# EAGLE board BMS Enerdel Adapter rev7 (EAGLE 9.6.2)
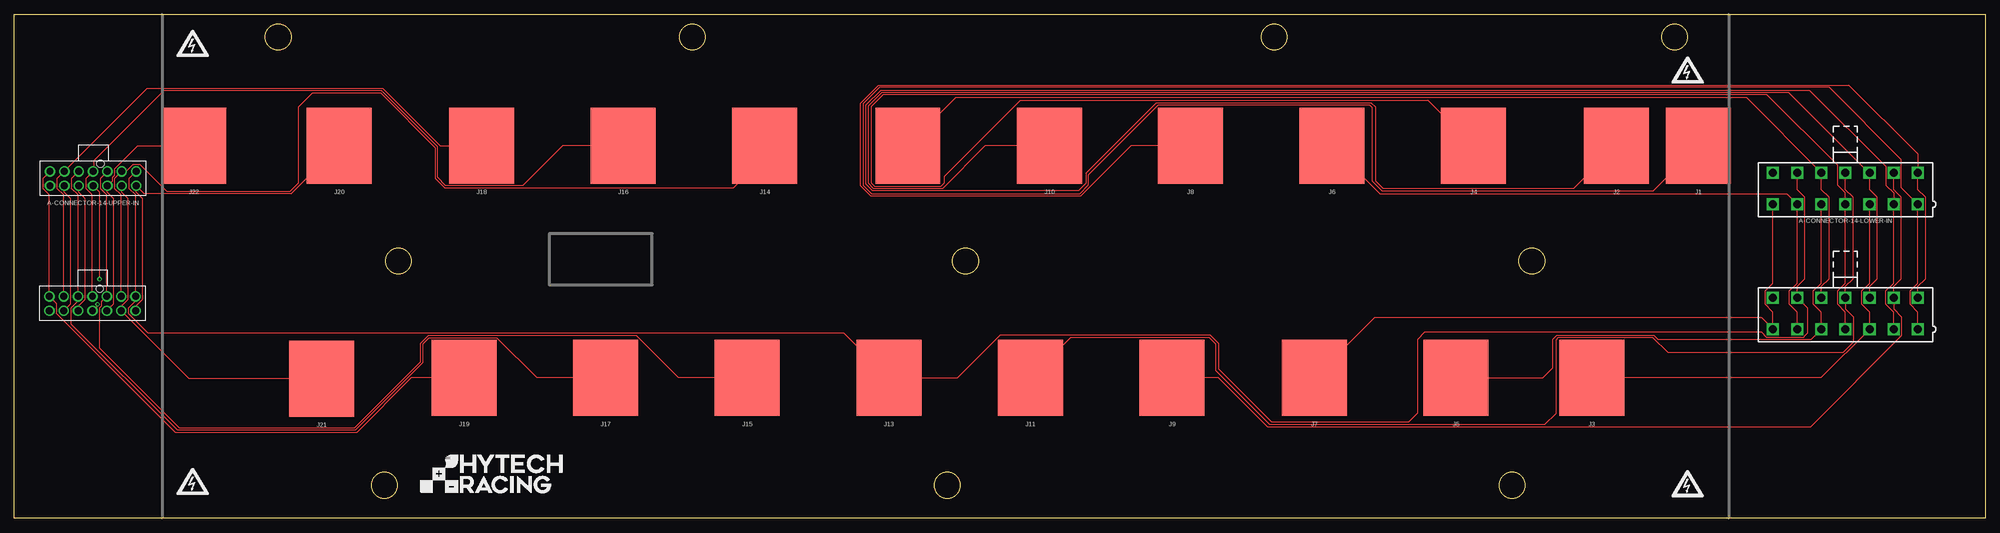
[diagram p0: board, top side]
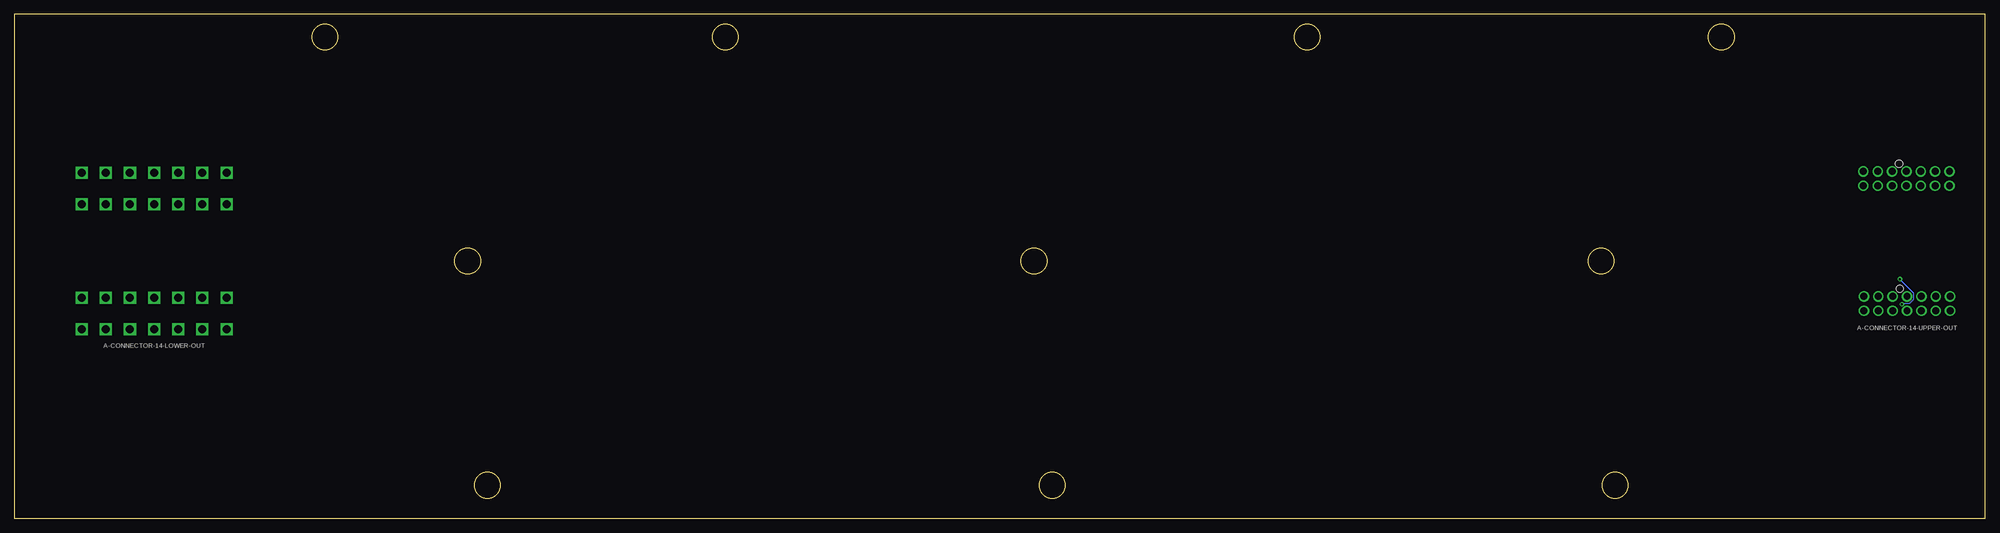
[diagram p1: board, bottom side, seen from below]

Size 342.9 x 87.63 mm. Coordinates in mm from the lower left corner, seen from the top.
Outline: 0,0 0,87.63 342.9,87.63 342.9,0 0,0
Outline: circle at 117.98,83.69 radius 2.25
Outline: circle at 219.2,83.69 radius 2.25
Outline: circle at 288.85,83.69 radius 2.25
Outline: circle at 66.8,44.7 radius 2.25
Outline: circle at 45.9,83.69 radius 2.25
Outline: circle at 165.48,44.7 radius 2.25
Outline: circle at 264.03,44.7 radius 2.25
Outline: circle at 260.6,5.71 radius 2.25
Outline: circle at 162.31,5.71 radius 2.25
Outline: circle at 64.39,5.71 radius 2.25
Copper layers (1*16): Top 0.035mm / dielectric 1.53mm / Bottom 0.035mm
Design rules "HyTech Default (2 Layer)": minimum track width 8mil, minimum drill 0.3mm, track to track 8mil, track to pad 8mil, pad to pad 8mil, via to via 22mil, smd to smd 8mil, copper to edge 17mil, drill to drill 23mil, minimum pad ring 9mil, minimum via ring 8mil, stop-mask expansion 8mil, vias tented up to drill 30mil, thermal gap 10mil

## Footprints (pad centres in the part's own frame; a part is rotated, then mirrored left to right if it is on the bottom)
MOLEX_MINIFIT_PTH_14 = drill 1.4 square: 1 12.6,-2.75; 2 8.4,-2.75; 3 4.2,-2.75; 4 0,-2.75; 5 -4.2,-2.75; 6 -8.4,-2.75; 7 -12.6,-2.75; 8 12.6,2.75; 9 8.4,2.75; 10 4.2,2.75; 11 0,2.75; 12 -4.2,2.75; 13 -8.4,2.75; 14 -12.6,2.75
MOLEX_NANOFIT_PTH_14 = drill 1.2: 1 7.5,0; 2 5,0; 3 2.5,0; 4 0,0; 5 -2.5,0; 6 -5,0; 7 -7.5,0; 8 7.5,-2.5; 9 5,-2.5; 10 2.5,-2.5; 11 0,-2.5; 12 -2.5,-2.5; 13 -5,-2.5; 14 -7.5,-2.5 | hole 1.3: 1.27,1.34
5222 = smd 11.303 x 13.208: 1 0,0

## Placement (x,y rotation side)
A-CONNECTOR-14-LOWER-IN  CONNECTOR-14_MINIFIT_  [MOLEX_MINIFIT_PTH_14]  318.59,57.35 0 top
A-CONNECTOR-14-LOWER-OUT  CONNECTOR-14_MINIFIT_  [MOLEX_MINIFIT_PTH_14]  318.59,35.61 0 top
A-CONNECTOR-14-UPPER-IN  CONNECTOR-14_NANOFIT_  [MOLEX_NANOFIT_PTH_14]  13.69,60.31 0 top
A-CONNECTOR-14-UPPER-OUT  CONNECTOR-14_NANOFIT_  [MOLEX_NANOFIT_PTH_14]  13.59,38.57 0 top
J1  CONNECTOR-1_5222_  [5222]  292.99,64.77 180 top
J2  CONNECTOR-1_5222_  [5222]  278.76,64.77 180 top
J3  CONNECTOR-1_5222_  [5222]  274.45,24.38 180 top
J4  CONNECTOR-1_5222_  [5222]  253.87,64.77 180 top
J5  CONNECTOR-1_5222_  [5222]  250.83,24.38 180 top
J6  CONNECTOR-1_5222_  [5222]  229.24,64.77 180 top
J7  CONNECTOR-1_5222_  [5222]  226.19,24.38 180 top
J8  CONNECTOR-1_5222_  [5222]  204.6,64.77 180 top
J9  CONNECTOR-1_5222_  [5222]  201.42,24.38 180 top
J10  CONNECTOR-1_5222_  [5222]  180.09,64.77 180 top
J11  CONNECTOR-1_5222_  [5222]  176.78,24.38 180 top
J12  CONNECTOR-1_5222_  [5222]  155.45,64.77 180 top
J13  CONNECTOR-1_5222_  [5222]  152.15,24.38 180 top
J14  CONNECTOR-1_5222_  [5222]  130.56,64.77 180 top
J15  CONNECTOR-1_5222_  [5222]  127.51,24.38 180 top
J16  CONNECTOR-1_5222_  [5222]  105.92,64.77 180 top
J17  CONNECTOR-1_5222_  [5222]  102.87,24.38 180 top
J18  CONNECTOR-1_5222_  [5222]  81.28,64.77 180 top
J19  CONNECTOR-1_5222_  [5222]  78.23,24.38 180 top
J20  CONNECTOR-1_5222_  [5222]  56.52,64.77 180 top
J21  CONNECTOR-1_5222_  [5222]  53.47,24.26 180 top
J22  CONNECTOR-1_5222_  [5222]  31.24,64.77 180 top
U$1  [HV_0.50"]  31.04,6.4 0 top
U$2  [LOGO_HYTECH_1.0"]  70.28,4.06 0 top
U$3  [HV_0.50"]  291.13,5.99 0 top
U$4  [HV_0.50"]  31.04,82.6 0 top
U$5  [HV_0.50"]  291.13,77.95 0 top
U$6  [NUMBER]  93.07,40.59 0 top

## Library data of the parts
A-CONNECTOR-14-LOWER-IN A-CONNECTOR-14-LOWER-OUT A-CONNECTOR-14-UPPER-IN A-CONNECTOR-14-UPPER-OUT = HyTechDevices
J1-J22 = HyTechDevices; DKPN: 36-5222-ND; MANUFACTURER: Keystone Electronics; MODEL: SPRING; MOPN: 534-5222; MPN: 5222
U$1-U$6 = HyTechAesthetics

## Nets
A1-B7: A-CONNECTOR-14-LOWER-IN.1 A-CONNECTOR-14-LOWER-OUT.1 J1.1
A2-B8: A-CONNECTOR-14-LOWER-IN.2 A-CONNECTOR-14-LOWER-OUT.2 J2.1
A3-B9: A-CONNECTOR-14-LOWER-IN.3 A-CONNECTOR-14-LOWER-OUT.3 J3.1
A4-B10: A-CONNECTOR-14-LOWER-IN.4 A-CONNECTOR-14-LOWER-OUT.4 J4.1
A5-B11: A-CONNECTOR-14-LOWER-IN.5 A-CONNECTOR-14-LOWER-OUT.5 J5.1
A6-B12: A-CONNECTOR-14-LOWER-IN.6 A-CONNECTOR-14-LOWER-OUT.6 J6.1
A7-B13: A-CONNECTOR-14-LOWER-IN.7 A-CONNECTOR-14-LOWER-OUT.7 J7.1
A8-B14: A-CONNECTOR-14-LOWER-IN.8 A-CONNECTOR-14-LOWER-OUT.8 J8.1
A9-B15: A-CONNECTOR-14-LOWER-IN.9 A-CONNECTOR-14-LOWER-OUT.9 J9.1
A10-B16: A-CONNECTOR-14-LOWER-IN.10 A-CONNECTOR-14-LOWER-OUT.10 J10.1
A11-B17: A-CONNECTOR-14-LOWER-IN.11 A-CONNECTOR-14-LOWER-OUT.11 J11.1
A12-B18: A-CONNECTOR-14-LOWER-IN.12 A-CONNECTOR-14-LOWER-OUT.12 J12.1
A13-B19: A-CONNECTOR-14-LOWER-IN.13 A-CONNECTOR-14-LOWER-OUT.13 A-CONNECTOR-14-UPPER-IN.1 A-CONNECTOR-14-UPPER-OUT.1 J13.1
A14-B20: A-CONNECTOR-14-UPPER-IN.2 A-CONNECTOR-14-UPPER-OUT.2 J14.1
A15-B21: A-CONNECTOR-14-UPPER-IN.3 A-CONNECTOR-14-UPPER-OUT.3 J15.1
A16-B22: A-CONNECTOR-14-UPPER-IN.4 A-CONNECTOR-14-UPPER-OUT.4 J16.1
A17-B23: A-CONNECTOR-14-UPPER-IN.5 A-CONNECTOR-14-UPPER-OUT.5 J17.1
A18-B24: A-CONNECTOR-14-UPPER-IN.6 A-CONNECTOR-14-UPPER-OUT.6 J18.1
A19-B25: A-CONNECTOR-14-UPPER-IN.7 A-CONNECTOR-14-UPPER-OUT.7 J19.1
A20-B26: A-CONNECTOR-14-UPPER-IN.8 A-CONNECTOR-14-UPPER-OUT.8 J20.1
A21-B27: A-CONNECTOR-14-UPPER-IN.9 A-CONNECTOR-14-UPPER-OUT.9 J21.1
A22-B28: A-CONNECTOR-14-UPPER-IN.10 A-CONNECTOR-14-UPPER-OUT.10 J22.1
N$5: A-CONNECTOR-14-UPPER-IN.11 A-CONNECTOR-14-UPPER-OUT.11
N$6: A-CONNECTOR-14-UPPER-IN.12 A-CONNECTOR-14-UPPER-OUT.12
N$7: A-CONNECTOR-14-UPPER-IN.13 A-CONNECTOR-14-UPPER-OUT.13

## Tracks (layer width: path | path; a pad name or v marks a point on that pad's centre or on a via)
A1-B7
  Top 0.203: A-CONNECTOR-14-LOWER-OUT.1 331.19,35.83 329.84,37.18 329.84,39.54 331.19,40.89 A-CONNECTOR-14-LOWER-IN.1 328.35,57.45 328.35,62.37 315.79,74.93 150.55,74.93 147.7,72.08 147.7,57.94 149.17,56.46 185.39,56.46 186.88,57.96 186.88,59.74 198.97,71.83 235.84,71.83 236.32,71.35 236.32,58.57 238,56.9 285.11,56.9 J1.1
A2-B8
  Top 0.203: A-CONNECTOR-14-LOWER-OUT.2 326.99,35.83 325.64,37.18 325.64,39.54 326.99,40.89 A-CONNECTOR-14-LOWER-IN.2 326.99,56.56 325.64,57.91 325.64,61.18 312.34,74.47 150.76,74.47 148.21,71.92 148.21,58.05 149.34,56.92 185.12,56.92 186.45,58.25 186.45,59.99 198.72,72.26 236.07,72.26 236.8,71.53 236.8,58.67 238.1,57.38 271.37,57.38 J2.1
A3-B9
  Top 0.203: A-CONNECTOR-14-LOWER-IN.3 322.79,40.89 321.44,39.54 321.44,37.18 322.79,35.83 A-CONNECTOR-14-LOWER-OUT.3 314.31,24.38 J3.1
A4-B10
  Top 0.203: A-CONNECTOR-14-LOWER-OUT.4 318.59,35.83 317.24,37.18 317.24,39.54 318.59,40.89 A-CONNECTOR-14-LOWER-IN.4 318.59,56.56 317.24,57.91 317.24,61.35 304.95,73.63 151.15,73.63 149.07,71.56 149.07,58.37 149.68,57.76 161.27,57.76 161.87,58.37 161.87,59.51 175.03,72.67 245.97,72.67 J4.1
A5-B11
  Top 0.203: A-CONNECTOR-14-LOWER-IN.5 314.39,40.89 313.04,39.54 313.04,37.18 314.39,35.83 A-CONNECTOR-14-LOWER-OUT.5 312.63,31.1 285.96,31.1 285.24,31.82 268.4,31.82 267.72,31.13 267.72,26.12 265.98,24.38 J5.1
A6-B12
  Top 0.203: A-CONNECTOR-14-LOWER-OUT.6 310.19,35.83 308.84,37.18 308.84,39.54 310.19,40.89 A-CONNECTOR-14-LOWER-IN.6 308.46,56.34 237.67,56.34 J6.1
A7-B13
  Top 0.203: A-CONNECTOR-14-LOWER-IN.7 305.99,40.89 304.64,39.54 304.64,37.18 305.99,35.83 A-CONNECTOR-14-LOWER-OUT.7 304.04,34.82 236.62,34.82 J7.1
A8-B14
  Top 0.203: A-CONNECTOR-14-LOWER-OUT.8 331.19,40.32 332.55,41.67 332.55,55.78 331.19,57.13 A-CONNECTOR-14-LOWER-IN.8 331.19,63.35 319.21,75.34 150.33,75.34 147.19,72.2 147.19,57.82 149.06,55.96 185.48,55.96 194.3,64.77 J8.1
A9-B15
  Top 0.203: A-CONNECTOR-14-LOWER-IN.9 326.99,57.13 328.35,55.78 328.35,41.67 326.99,40.32 A-CONNECTOR-14-LOWER-OUT.9 326.99,36.4 328.35,35.05 328.35,31.68 312.46,15.8 218.12,15.8 209.54,24.38 J9.1
A10-B16
  Top 0.203: A-CONNECTOR-14-LOWER-OUT.10 322.79,40.32 324.15,41.67 324.15,55.78 322.79,57.13 322.79,59.92 | 322.79,59.92 A-CONNECTOR-14-LOWER-IN.10 | J10.1 168.91,64.77 161.47,57.33 149.53,57.33 148.62,58.24 148.62,71.75 150.93,74.07 308.64,74.07 322.79,59.92
A11-B17
  Top 0.203: A-CONNECTOR-14-LOWER-IN.11 318.59,57.13 319.95,55.78 319.95,41.67 318.59,40.32 A-CONNECTOR-14-LOWER-OUT.11 318.59,36.4 319.95,35.05 319.95,30.59 318.1,28.74 287.74,28.74 285.12,31.36 268.57,31.36 268.17,30.96 268.17,18.16 266.22,16.2 218.47,16.2 209.07,25.6 209.07,30.25 207.97,31.34 183.74,31.34 J11.1
A12-B18
  Top 0.203: A-CONNECTOR-14-LOWER-OUT.12 314.39,40.32 315.75,41.67 315.75,55.78 314.39,57.13 A-CONNECTOR-14-LOWER-IN.12 301.39,73.1 163.78,73.1 J12.1
A13-B19
  Top 0.203: A-CONNECTOR-14-UPPER-IN.1 19.99,59.11 19.99,57.31 21.09,56.21 A-CONNECTOR-14-UPPER-OUT.1 21.09,37.77 19.88,36.57 19.88,35.57 23.26,32.2 144.33,32.2 J13.1 164.1,24.38 171.62,31.9 207.99,31.9 209.47,30.42 209.47,26.03 218.71,16.79 242.62,16.79 244.17,18.34 244.17,31.11 245.46,32.4 303.92,32.4 304.82,31.51 311.37,31.51 311.55,31.68 311.55,31.69 312.06,32.21 312.06,36.49 A-CONNECTOR-14-LOWER-OUT.13 310.19,40.32 311.55,41.67 311.55,55.78 310.19,57.13 A-CONNECTOR-14-LOWER-IN.13
A14-B20
  Top 0.203: A-CONNECTOR-14-UPPER-OUT.2 18.59,56.21 17.49,57.31 17.49,59.11 A-CONNECTOR-14-UPPER-IN.2 19.49,60.31 20.69,61.52 21.81,61.52 26.48,56.85 48.01,56.85 49.5,58.35 49.5,71.55 51.92,73.97 63.7,73.97 73.2,64.47 73.2,59.1 74.85,57.45 125.15,57.45 130.45,62.76 130.45,64.67 J14.1
A15-B21
  Top 0.203: A-CONNECTOR-14-UPPER-IN.3 14.99,59.11 14.99,57.31 16.09,56.21 A-CONNECTOR-14-UPPER-OUT.3 15.21,37.69 15.21,36.91 14.88,36.58 14.88,29.58 28.79,15.67 59.14,15.67 70.6,27.13 70.6,30.34 71.96,31.7 108.24,31.7 115.56,24.38 J15.1
A16-B22
  Top 0.203: A-CONNECTOR-14-UPPER-OUT.4 13.59,56.21 12.49,57.31 12.49,59.11 A-CONNECTOR-14-UPPER-IN.4 13.78,60.4 13.78,62.14 26.01,74.37 63.87,74.37 73.61,64.63 73.61,59.3 75.05,57.86 88.45,57.86 95.36,64.77 J16.1
A17-B23
  Top 0.203: A-CONNECTOR-14-UPPER-IN.5 9.99,59.11 9.99,57.31 11.09,56.21 A-CONNECTOR-14-UPPER-OUT.5 11.09,37.77 9.88,36.57 9.88,33.77 28.39,15.27 59.31,15.27 71.06,27.01 71.06,30.22 72.12,31.29 84.01,31.29 90.92,24.38 J17.1
A18-B24
  Top 0.203: A-CONNECTOR-14-UPPER-OUT.6 8.59,56.21 7.49,57.31 7.49,59.11 A-CONNECTOR-14-UPPER-IN.6 23.16,74.78 64.04,74.78 74.05,64.77 J18.1
A19-B25
  Top 0.203: A-CONNECTOR-14-UPPER-IN.7 4.99,59.11 4.99,57.31 6.09,56.21 A-CONNECTOR-14-UPPER-OUT.7 7.38,37.27 7.38,35.57 28.1,14.86 59.52,14.86 69.05,24.38 J19.1
A20-B26
  Top 0.203: A-CONNECTOR-14-UPPER-OUT.8 21.09,36.87 22.29,38.07 22.29,55.58 21.19,56.68 A-CONNECTOR-14-UPPER-IN.8 22.56,56.44 48.19,56.44 J20.1
A21-B27
  Top 0.203: A-CONNECTOR-14-UPPER-IN.9 18.69,56.68 19.79,55.58 19.79,38.07 18.59,36.87 A-CONNECTOR-14-UPPER-OUT.9 30.4,24.26 J21.1
A22-B28
  Top 0.203: A-CONNECTOR-14-UPPER-OUT.10 17.29,37.27 17.29,55.58 16.19,56.68 A-CONNECTOR-14-UPPER-IN.10 17.08,58.7 17.08,59.28 17.49,59.68 17.49,60.81 21.44,64.77 J22.1
N$5  (via drill 0.35)
  Top 0.203: A-CONNECTOR-14-UPPER-OUT.11 14.48,36.96 v14.48,37.21 | v14.83,41.58 14.83,56.67 A-CONNECTOR-14-UPPER-IN.11
  Bottom 0.203: v14.48,37.21 14.32,37.36 13.09,37.36 12.38,38.07 12.38,39.13 v14.83,41.58
N$6
  Top 0.203: A-CONNECTOR-14-UPPER-OUT.12 11.09,36.87 12.29,38.07 12.29,55.58 11.19,56.68 A-CONNECTOR-14-UPPER-IN.12
N$7
  Top 0.203: A-CONNECTOR-14-UPPER-IN.13 8.69,56.68 9.79,55.58 9.79,37.27 A-CONNECTOR-14-UPPER-OUT.13

## Text on the board
tDocu: DANGER HIGH VOLTAGE | Mode A | Mode A | Enerdel Adapter Rev 7 / Designed by Stephen Noh / and Noah Bruckner | DANGER HIGH VOLTAGE